# Altium PCB PCB1.PcbDoc (part 6 of 7)
Units mm, origin at the board's own origin, x right, y up, seen from the top; angles counter-clockwise.
Board outline 100 x 100 mm, 6 copper layers (Top, GND_1, Signal, PWR, GND_2, Bottom), stack 0.816 mm thick; 321 components, 260 nets, 1718 pads, 694 vias.
Unrouted connection lines stored in the file: 527.
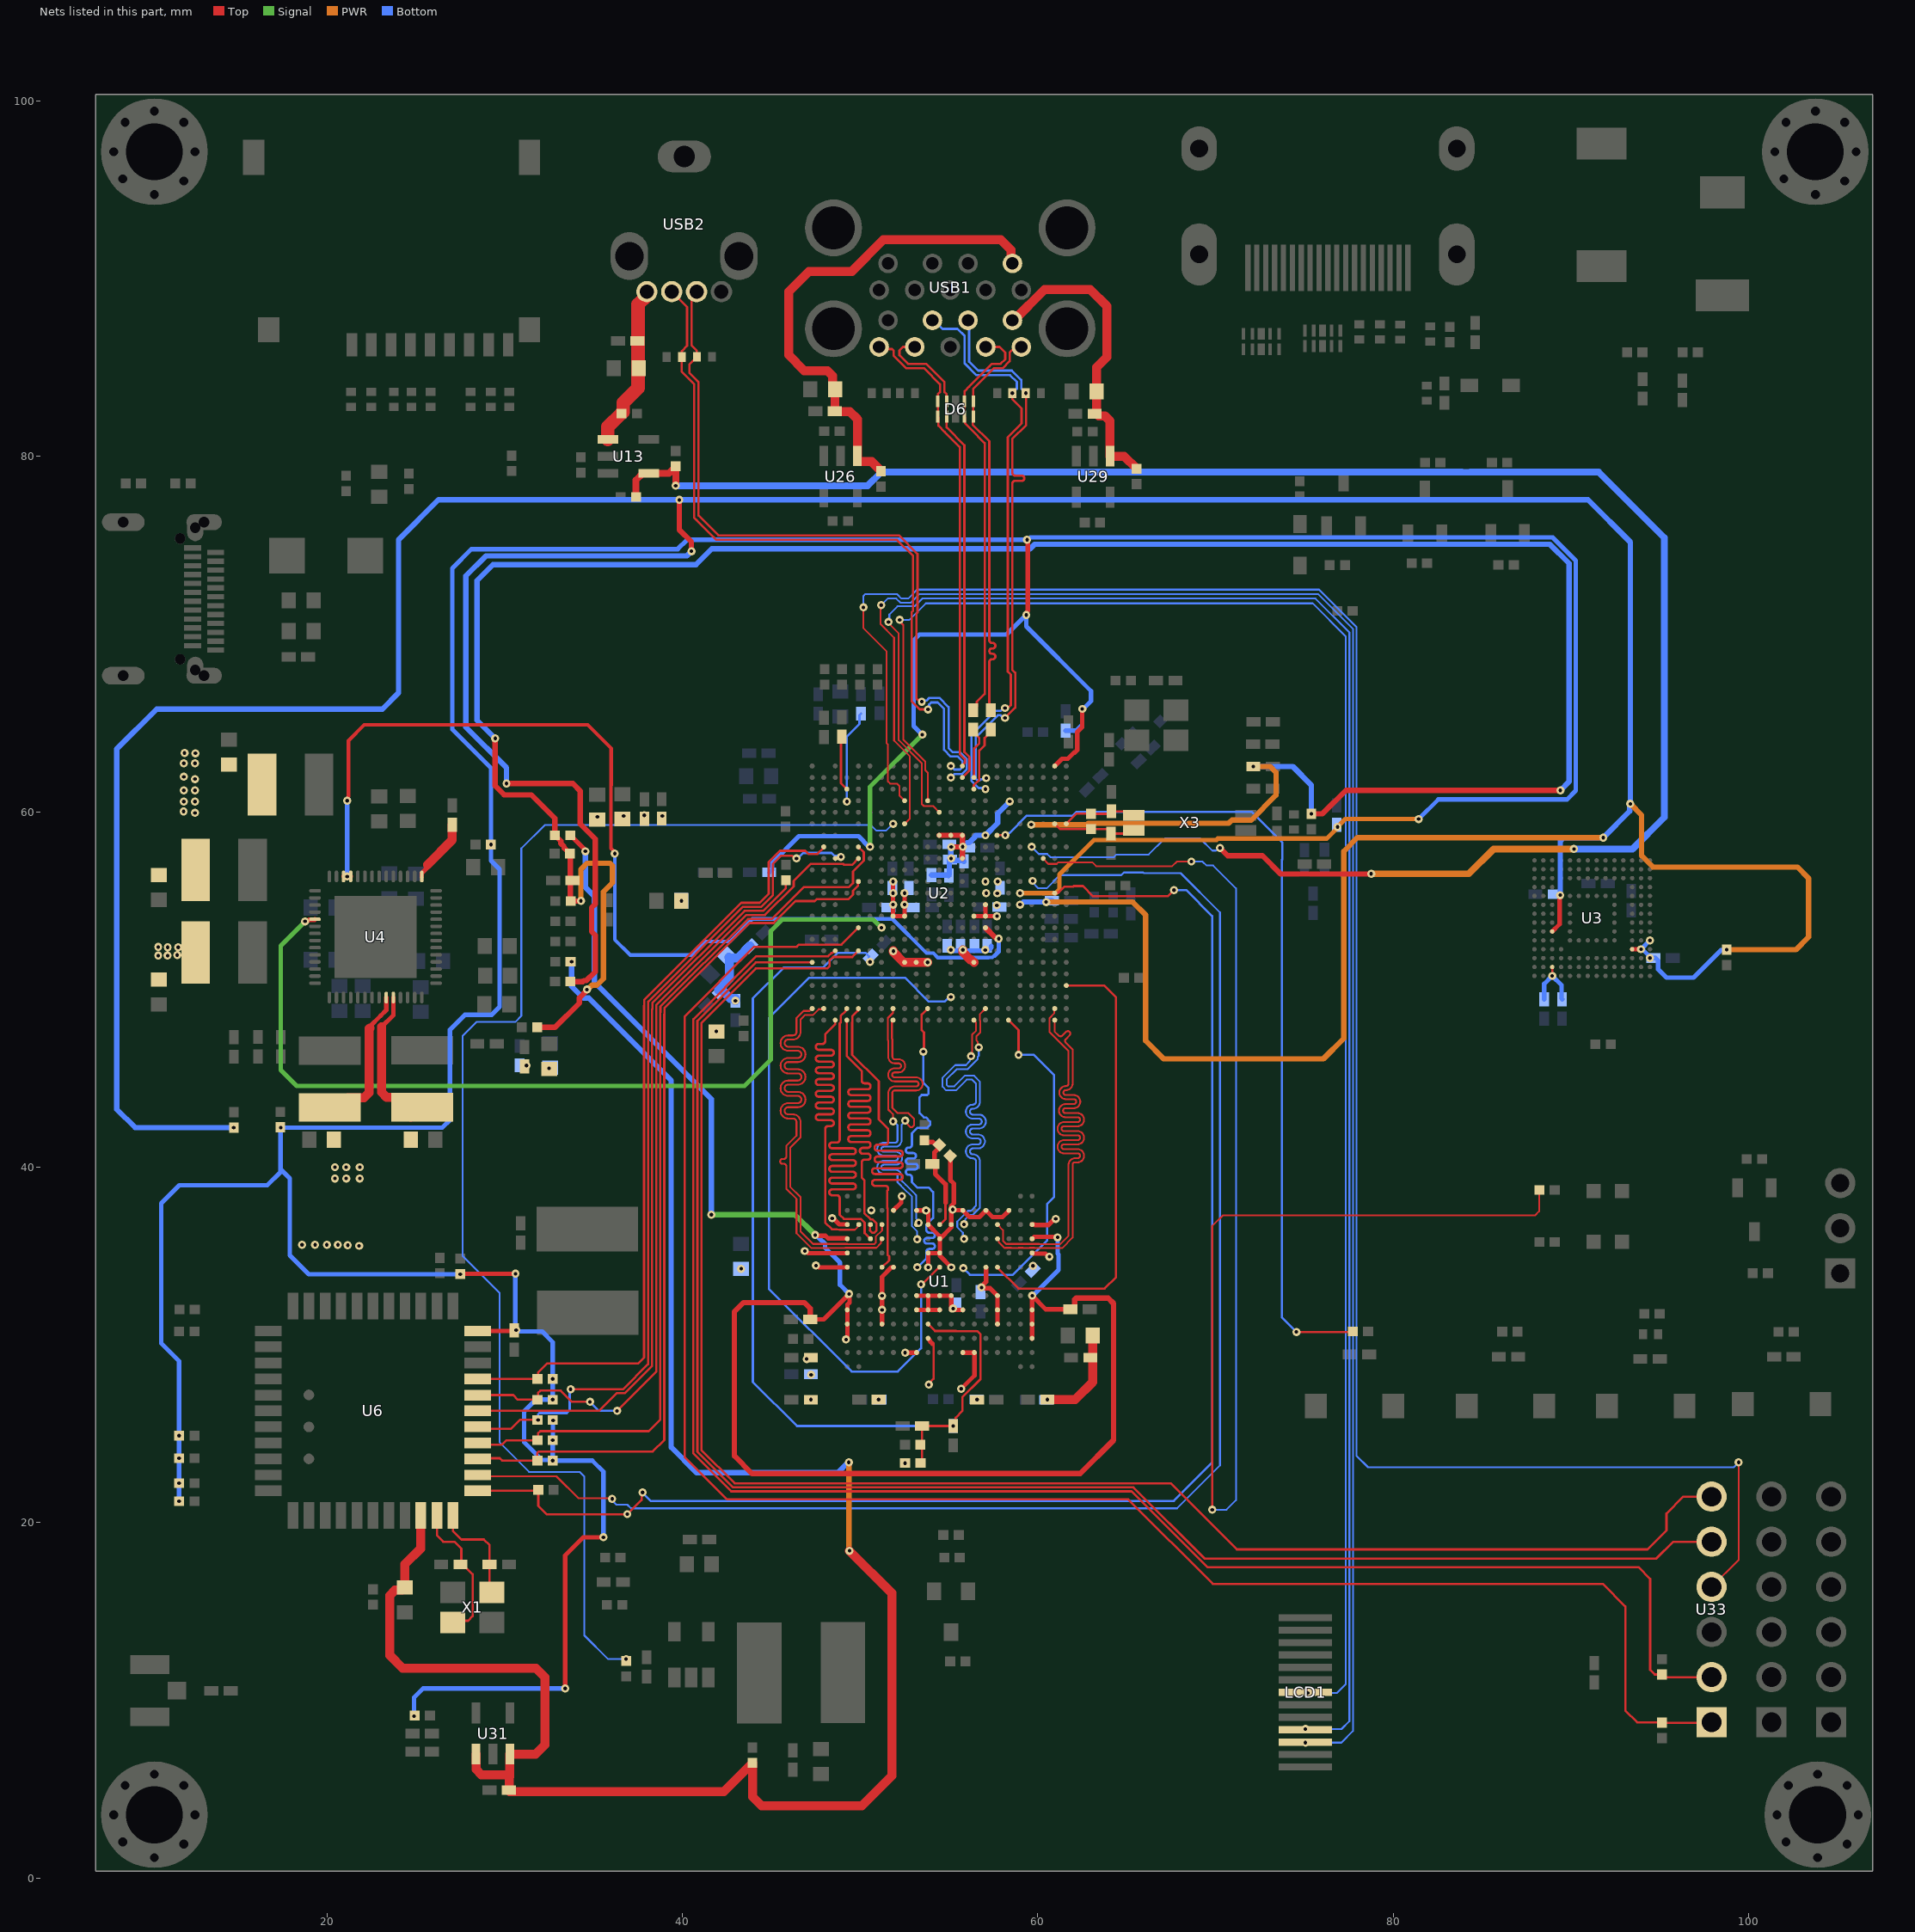
[diagram p9: the nets of this part, all layers, seen from the top]

## Via types
v1: diameter 0.457, hole 0.203, Top to Bottom, tented both sides, 685 vias
v2: diameter 0.61, hole 0.305, Top to Bottom, tented both sides, 9 vias

## Nets (pads, with @x,y where several pads share a name; then routed paths per layer and width w, separated by ;. In a path a pad name is that pad's centre, name@x,y a point inside that pad or via, vN(x,y) a via of type N, cw(c..) or ccw(c..) an arc to the next point about the centre after c; other vN are vias at no path point) (continued)
SDQ29: U1.B11 U2.AC3 | length 25.9
  Top w0.102: 48.698,36.515 48.71,36.503 48.804,36.503 48.822,36.485 49.703,36.485 49.854,36.636 49.854,36.639 49.934,36.718 U1.B11@49.934,36.767
  Top w0.127: U2.AC3@48.603,48.282 48.603,48.055 48.04,47.492 48.04,47.371 48.04,47.107 cw(c47.874,47.107) 47.874,46.942 47.674,46.942 ccw(c47.674,46.777) 47.674,46.612 48.356,46.612 cw(c48.356,46.447) 48.356,46.282 47.674,46.282 ccw(c47.674,46.117) 47.674,45.952 48.356,45.952 cw(c48.356,45.787) 48.356,45.621 47.674,45.621 ccw(c47.674,45.456) 47.674,45.291 48.356,45.291 cw(c48.356,45.126) 48.356,44.961 47.674,44.961 ccw(c47.674,44.796) 47.674,44.631 48.356,44.631 cw(c48.356,44.466) 48.356,44.301 47.674,44.301 ccw(c47.674,44.136) 47.674,43.97 48.356,43.97 cw(c48.356,43.805) 48.356,43.64 47.674,43.64 ccw(c47.674,43.475) 47.674,43.31 48.356,43.31 cw(c48.356,43.145) 48.356,42.98 47.674,42.98 ccw(c47.674,42.815) 47.674,42.65 48.356,42.65 cw(c48.356,42.485) 48.356,42.319 48.205,42.319 ccw(c48.205,42.154) 48.04,42.154 48.04,41.761 48.04,36.894 48.418,36.515 48.698,36.515
SDQ30: U1.C11 U2.AC4 | length 26.2
  Top w0.127: U2.AC4@49.253,48.276 49.253,46.251 50.091,45.413 50.091,44.952 50.091,44.889 ccw(c50.256,44.889) 50.256,44.723 50.424,44.723 cw(c50.424,44.558) 50.424,44.393 49.498,44.393 ccw(c49.498,44.228) 49.498,44.063 50.424,44.063 cw(c50.424,43.898) 50.424,43.733 49.498,43.733 ccw(c49.498,43.568) 49.498,43.403 50.424,43.403 cw(c50.424,43.238) 50.424,43.072 49.498,43.072 ccw(c49.498,42.907) 49.498,42.742 50.424,42.742 cw(c50.424,42.577) 50.424,42.412 49.498,42.412 ccw(c49.498,42.247) 49.498,42.082 50.424,42.082 cw(c50.424,41.917) 50.424,41.752 49.498,41.752 ccw(c49.498,41.587) 49.498,41.421 50.424,41.421 cw(c50.424,41.256) 50.424,41.091 50.15,41.091 ccw(c50.15,40.926) 50.15,40.761 50.424,40.761 cw(c50.424,40.596) 50.424,40.431 50.256,40.431 ccw(c50.256,40.266) 50.091,40.266 50.091,40.001 50.091,39.412 50.237,39.266 50.237,38.29 50.237,38.227 ; 50.236,38.226 50.236,37.694 50.237,37.692 50.237,37.418 50.584,37.071 50.686,37.071 50.927,36.83 50.927,36.449 50.8,36.322 50.673,36.322 50.546,36.449 50.55,36.453 50.55,36.747 U1.C11@50.58,36.776
SDQ31: U1.C10 U2.AB4 | length 26.1
  Top w0.127: U2.AB4@49.253,48.932 49.253,48.89 49.18,48.818 49.18,48.791 48.904,48.515 48.904,48.41 48.907,48.408 48.907,48.156 48.853,48.102 48.853,42.046 48.853,41.561 cw(c48.688,41.561) 48.688,41.396 48.432,41.396 ccw(c48.432,41.231) 48.432,41.065 49.592,41.065 cw(c49.592,40.9) 49.592,40.735 48.432,40.735 ccw(c48.432,40.57) 48.432,40.405 49.592,40.405 cw(c49.592,40.24) 49.592,40.075 48.432,40.075 ccw(c48.432,39.91) 48.432,39.745 49.592,39.745 cw(c49.592,39.58) 49.592,39.414 48.432,39.414 ccw(c48.432,39.249) 48.432,39.084 49.592,39.084 cw(c49.592,38.919) 49.592,38.754 48.432,38.754 ccw(c48.432,38.589) 48.432,38.424 48.688,38.424 cw(c48.688,38.259) 48.853,38.259 48.853,38.195 48.853,37.326 49.083,37.097 50.037,37.097 50.253,36.881 50.253,36.297 U1.C10@50.584,35.966
SDQM0: U1.L8 U2.AC18 | length 19.8
  Top w0.127: U2.AC18@58.353,48.282 58.918,47.717 v1(58.918,46.323)
  Bottom w0.127: v1(55.803,34.32) 56.174,33.949 58.591,33.949 60.52,35.879 60.52,37.931 60.906,38.316 60.906,45.199 59.782,46.323 v1(58.918,46.323)
SDQM1: U1.P8 U2.Y23 | length 26.3
  Top w0.127: U1.P8@57.734,34.366 57.734,34.343 58.905,33.172 63.76,33.172 64.401,33.813 64.401,49.559 63.728,50.232 U2.Y23@61.603,50.232
SDQM2: U1.G8 U2.AB11 | length 21.6
  Top w0.127: v1(53.558,46.51) 53.594,46.546 53.594,47.584 53.467,47.711 53.467,48.596 U2.AB11@53.803,48.932
  Bottom w0.127: v1(53.222,34.373) 53.734,34.885 53.734,35.253 cw(c53.886,35.253) 53.886,35.405 54.054,35.405 ccw(c54.054,35.558) 54.054,35.71 53.757,35.71 cw(c53.757,35.863) 53.757,36.015 54.054,36.015 ccw(c54.054,36.167) 54.054,36.32 53.886,36.32 cw(c53.886,36.472) 53.734,36.472 53.734,36.78 54.079,37.126 54.105,37.152 54.105,38.605 53.848,38.862 53.213,38.862 52.915,39.16 52.915,39.364 52.915,39.428 ccw(c52.762,39.428) 52.762,39.58 52.724,39.58 cw(c52.724,39.733) 52.724,39.885 53.091,39.885 ccw(c53.091,40.037) 53.091,40.19 52.724,40.19 cw(c52.724,40.342) 52.724,40.495 52.991,40.495 ccw(c52.991,40.647) 52.991,40.799 52.724,40.799 cw(c52.724,40.952) 52.724,41.104 52.762,41.104 ccw(c52.762,41.257) 52.915,41.257 52.915,41.694 52.915,41.915 53.226,42.226 53.783,42.226 53.94,42.383 53.94,42.58 53.721,42.799 53.594,42.799 53.345,43.048 53.345,43.302 53.34,43.307 53.34,43.942 53.467,44.069 53.774,44.069 53.848,44.143 53.848,44.45 53.558,44.74 v1(53.558,46.51)
SDQM3: U1.D8 U2.AB5 | length 26.3
  Top w0.127: U2.AB5@49.903,48.932 49.874,48.903 49.874,48.807 49.557,48.49 49.557,48.156 49.555,48.155 49.555,46.33 51.054,44.831 51.054,42.691 51.577,42.168 51.577,41.709 51.577,41.434 cw(c51.412,41.434) 51.412,41.269 50.981,41.269 ccw(c50.981,41.104) 50.981,40.939 52.236,40.939 cw(c52.236,40.773) 52.236,40.608 50.981,40.608 ccw(c50.981,40.443) 50.981,40.278 52.236,40.278 cw(c52.236,40.113) 52.236,39.948 50.838,39.948 ccw(c50.838,39.783) 50.838,39.618 52.236,39.618 cw(c52.236,39.453) 52.236,39.288 50.838,39.288 ccw(c50.838,39.122) 50.838,38.957 51.412,38.957 cw(c51.412,38.792) 51.577,38.792 51.577,38.729 51.52,38.672 51.52,37.714 51.542,37.693 51.542,35.078 51.633,34.986 51.633,34.765 U1.D8@51.234,34.366
SDQS0_N: U1.L11 U2.AB16 | length 19.7
  Top w0.102: v1(56.679,46.751) 56.611,46.819 56.611,47.07 56.536,47.145 56.536,47.356 56.762,47.582 56.762,48.231 56.735,48.259 56.735,48.614 U2.AB16@57.053,48.932
  Bottom w0.102: v1(55.847,36.79) 55.909,36.851 55.909,37.064 56.163,37.318 56.332,37.318 56.744,37.73 56.744,38.042 56.744,40.12 56.744,40.171 56.744,40.336 ccw(c56.35,40.336) 56.35,40.73 56.345,40.73 cw(c56.345,40.895) 56.345,41.06 56.629,41.06 ccw(c56.629,41.454) 56.629,41.848 56.345,41.848 cw(c56.345,42.013) 56.345,42.178 56.683,42.178 ccw(c56.683,42.571) 56.683,42.965 56.345,42.965 cw(c56.345,43.13) 56.345,43.295 56.35,43.295 ccw(c56.35,43.689) 56.744,43.689 56.744,44.577 56.744,44.815 56.61,44.949 56.531,45.027 56.397,45.161 55.906,45.161 55.303,44.558 54.942,44.558 54.871,44.629 54.871,44.945 55.446,45.52 56.045,45.52 56.619,46.094 56.619,46.208 56.679,46.267 v1(56.679,46.751)
SDQS0_P: U1.L10 U2.AC15 | length 19.9
  Top w0.102: v1(56.24,46.251) 56.299,46.311 56.299,47.454 56.525,47.68 56.525,48.133 56.403,48.256 U2.AC15@56.403,48.282
  Bottom w0.102: v1(55.851,35.967) 55.783,36.035 55.783,36.318 55.468,36.633 55.468,36.947 56.068,37.547 56.237,37.547 56.515,37.825 56.515,40.171 56.515,40.336 ccw(c56.35,40.336) 56.35,40.501 56.345,40.501 cw(c56.345,40.895) 56.345,41.289 56.629,41.289 ccw(c56.629,41.454) 56.629,41.619 56.345,41.619 cw(c56.345,42.013) 56.345,42.406 56.683,42.406 ccw(c56.683,42.571) 56.683,42.737 56.345,42.737 cw(c56.345,43.13) 56.345,43.524 56.35,43.524 ccw(c56.35,43.689) 56.515,43.689 56.515,44.5 ; v1(56.24,46.251) 56.179,46.19 56.179,45.977 55.95,45.749 55.351,45.749 54.642,45.04 54.642,44.534 54.847,44.33 55.398,44.33 56.001,44.933 56.303,44.933 56.515,44.72 56.515,44.5 ; 56.515,44.544 56.515,44.5
SDQS1_N: U1.P11 U2.AB22 | length 25.7
  Top w0.102: U1.P11@57.734,36.767 58.039,36.462 58.039,35.995 58.039,35.864 58.218,35.685 60.069,35.685 60.075,35.679 61.27,35.679 61.729,36.138 61.729,38.45 61.729,40.139 cw(c62.097,40.139) 62.097,40.508 62.237,40.508 ccw(c62.237,40.647) 62.237,40.787 61.477,40.787 cw(c61.477,41.155) 61.477,41.524 62.237,41.524 ccw(c62.237,41.663) 62.237,41.803 61.477,41.803 cw(c61.477,42.171) 61.477,42.54 62.237,42.54 ccw(c62.237,42.679) 62.237,42.819 61.559,42.819 cw(c61.559,43.187) 61.559,43.556 62.021,43.556 ccw(c62.021,43.695) 62.021,43.835 61.582,43.835 cw(c61.582,44.203) 61.582,44.572 61.589,44.572 ccw(c61.589,44.711) 61.729,44.711 61.729,45.549 61.729,46.537 60.662,47.604 60.662,48.402 60.919,48.659 60.919,48.898 U2.AB22@60.953,48.932
SDQS1_P: U1.P10 U2.AC22 | length 25.7
  Top w0.102: U1.P10@57.734,35.966 57.734,35.923 57.81,35.847 57.81,35.769 58.123,35.457 58.195,35.457 58.205,35.466 58.498,35.466 58.507,35.457 58.898,35.457 58.907,35.466 59.148,35.466 59.158,35.457 59.548,35.457 59.558,35.466 59.798,35.466 59.808,35.457 61.358,35.457 61.365,35.451 61.957,36.043 61.957,38.45 61.957,40.139 cw(c62.097,40.139) 62.097,40.279 62.237,40.279 ccw(c62.237,40.647) 62.237,41.016 61.477,41.016 cw(c61.477,41.155) 61.477,41.295 62.237,41.295 ccw(c62.237,41.663) 62.237,42.032 61.477,42.032 cw(c61.477,42.171) 61.477,42.311 62.237,42.311 ccw(c62.237,42.679) 62.237,43.048 61.559,43.048 cw(c61.559,43.187) 61.559,43.327 62.021,43.327 ccw(c62.021,43.695) 62.021,44.064 61.582,44.064 cw(c61.582,44.203) 61.582,44.343 61.589,44.343 ccw(c61.589,44.711) 61.957,44.711 61.957,45.549 61.957,46.632 61.81,46.78 61.774,46.816 61.576,47.013 cw(c61.675,47.112) 61.576,47.211 61.79,47.425 ccw(c61.691,47.524) 61.79,47.622 ccw(c61.691,47.524) 61.592,47.622 61.378,47.408 ; U2.AC22@60.954,48.281 60.944,48.27 60.944,48.158 60.944,47.645 61.181,47.408 ccw(c61.28,47.507) 61.378,47.408
SDQS2_N: U1.G11 U2.AC8 | length 21.5
  Top w0.102: U2.AC8@51.853,48.282 51.853,48.234 51.791,48.171 51.791,47.24 51.816,47.215 51.816,46.38 51.816,46.215 ccw(c51.956,46.215) 51.956,46.076 52.168,46.076 cw(c52.168,45.707) 52.168,45.339 51.944,45.339 ccw(c51.944,45.199) 51.944,45.06 53.151,45.06 cw(c53.151,44.691) 53.151,44.323 51.954,44.323 ccw(c51.954,44.183) 51.814,44.183 51.814,43.968 51.816,43.966 51.816,43.753 51.816,43.342 52.105,43.053 52.705,43.053 53.036,42.722 53.036,42.368 52.919,42.251 52.835,42.251 52.536,42.551 v1(52.536,42.623)
  Bottom w0.102: v1(52.536,42.623) 52.536,42.585 52.336,42.385 52.336,42.198 52.336,41.525 cw(c51.968,41.525) 51.968,41.157 51.328,41.157 ccw(c51.328,41.017) 51.328,40.877 51.989,40.877 cw(c51.989,40.509) 51.989,40.141 51.328,40.141 ccw(c51.328,40.001) 51.328,39.861 51.968,39.861 cw(c51.968,39.493) 52.336,39.493 52.336,39.249 52.521,39.064 52.562,39.024 52.994,38.591 ; 53.041,38.544 53.152,38.433 53.152,37.328 53.149,37.326 53.149,37.109 53.3,36.957 v1(53.3,36.871)
SDQS2_P: U1.G10 U2.AB8 | length 21.6
  Top w0.102: U2.AB8@51.853,48.932 51.853,48.693 51.562,48.402 51.562,47.145 51.587,47.12 51.587,46.38 51.587,46.215 ccw(c51.956,46.215) 51.956,45.847 52.168,45.847 cw(c52.168,45.707) 52.168,45.568 51.944,45.568 ccw(c51.944,45.199) 51.944,44.831 53.151,44.831 cw(c53.151,44.691) 53.151,44.552 51.954,44.552 ccw(c51.954,44.183) 51.586,44.183 51.586,43.968 51.584,43.966 51.584,43.753 51.587,43.75 51.587,43.247 51.843,42.992 51.843,42.591 v1(51.854,42.581)
  Bottom w0.102: v1(51.854,42.581) 51.903,42.581 52.107,42.376 52.107,42.198 52.107,41.525 cw(c51.968,41.525) 51.968,41.385 51.328,41.385 ccw(c51.328,41.017) 51.328,40.649 51.989,40.649 cw(c51.989,40.509) 51.989,40.369 51.328,40.369 ccw(c51.328,40.001) 51.328,39.633 51.968,39.633 cw(c51.968,39.493) 52.107,39.493 52.107,39.155 52.238,39.024 52.426,38.836 52.923,38.339 52.923,37.423 52.921,37.421 52.921,36.685 53.213,36.392 v1(53.213,35.941)
SDQS3_N: U1.D11 U2.AB2 | length 26.3
  Top w0.102: U2.AB2@47.953,48.932 47.919,48.898 47.68,48.898 47.355,48.573 46.911,48.573 46.762,48.423 46.649,48.311 46.649,47.623 cw(c46.218,47.623) 46.218,47.191 45.955,47.191 ccw(c45.955,46.988) 45.752,46.988 ccw(c45.955,46.988) 45.955,46.785 46.494,46.785 cw(c46.494,46.353) 46.926,46.353 cw(c46.494,46.353) 46.494,45.921 45.955,45.921 ccw(c45.955,45.718) 45.752,45.718 ccw(c45.955,45.718) 45.955,45.515 46.494,45.515 cw(c46.494,45.083) 46.926,45.083 cw(c46.494,45.083) 46.494,44.651 45.955,44.651 ccw(c45.955,44.448) 45.752,44.448 ccw(c45.955,44.448) 45.955,44.245 46.494,44.245 cw(c46.494,43.813) 46.926,43.813 cw(c46.494,43.813) 46.494,43.381 45.955,43.381 ccw(c45.955,43.178) 45.752,43.178 ccw(c45.955,43.178) 45.955,42.975 46.218,42.975 cw(c46.218,42.543) 46.649,42.543 46.649,42.051 46.649,41.688 46.076,41.114 46.076,38.887 46.649,38.314 46.649,36.385 47.359,35.676 47.368,35.685 49.276,35.685 49.285,35.676 50.796,35.676 50.878,35.757 50.878,36.087 51.234,36.444 U1.D11@51.234,36.767
SDQS3_P: U1.D10 U2.AB1 | length 26.3
  Top w0.102: U2.AB1@47.303,48.932 47.285,48.932 47.154,48.801 46.817,48.801 46.438,48.423 46.421,48.406 46.421,47.623 cw(c46.218,47.623) 46.218,47.42 45.955,47.42 ccw(c45.955,46.988) 45.523,46.988 ccw(c45.955,46.988) 45.955,46.556 46.494,46.556 cw(c46.494,46.353) 46.698,46.353 cw(c46.494,46.353) 46.494,46.15 45.955,46.15 ccw(c45.955,45.718) 45.523,45.718 ccw(c45.955,45.718) 45.955,45.286 46.494,45.286 cw(c46.494,45.083) 46.698,45.083 cw(c46.494,45.083) 46.494,44.88 45.955,44.88 ccw(c45.955,44.448) 45.523,44.448 ccw(c45.955,44.448) 45.955,44.016 46.494,44.016 cw(c46.494,43.813) 46.698,43.813 cw(c46.494,43.813) 46.494,43.61 45.955,43.61 ccw(c45.955,43.178) 45.523,43.178 ccw(c45.955,43.178) 45.955,42.746 46.218,42.746 cw(c46.218,42.543) 46.421,42.543 46.421,42.051 46.421,41.783 45.847,41.209 45.847,40.97 45.847,40.611 cw(c45.707,40.611) 45.707,40.471 45.64,40.471 ccw(c45.64,40.331) 45.64,40.191 45.707,40.191 cw(c45.707,40.052) 45.847,40.052 45.847,40.001 45.847,38.793 46.421,38.219 46.421,36.291 47.264,35.447 49.14,35.447 49.159,35.466 50.872,35.466 ; 50.872,35.447 50.891,35.447 51.172,35.729 51.172,35.856 51.24,35.924 U1.D10@51.24,35.96
SODT0: U1.J8 U2.AA13 | length 43.2
  Top w0.127: v1(53.431,33.409) 53.471,33.409 54.428,34.366 U1.J8@54.483,34.366
  Bottom w0.127: v1(53.431,33.409) 53.431,29.809 52.126,28.504 49.525,28.504 44.868,33.162 44.868,48.406 47.127,50.665 52.519,50.665 53.858,49.327 54.766,49.327 55.021,49.582 v1(55.103,49.582)
SPI1_CLK: LCD1.4 U2.E12 | length 103.6
  Top w0.102: v1(51.599,70.685) 51.599,70.626 52.175,70.049 52.175,64.04 53.467,62.748 53.467,60.452 53.594,60.325 54.11,60.325 U2.E12@54.453,59.982
  Bottom w0.102: v1(51.599,70.685) 51.644,70.731 51.644,71.112 52.102,71.57 53.059,71.57 53.498,72.009 75.63,72.009 77.534,70.106 77.534,8.827 77.089,8.382 v1(75.057,8.382)
SPI1_CS: LCD1.7 U2.D11 | length 98.4
  Top w0.102: v1(52.231,70.811) 52.231,70.714 52.43,70.515 52.43,64.069 53.669,62.831 53.669,62.349 53.803,62.215 U2.D11@53.803,60.632
  Bottom w0.102: v1(52.231,70.811) 52.777,70.811 53.703,71.737 75.474,71.737 77.332,69.88 77.332,10.911 76.835,10.414 v1(75.184,10.414)
SPI1_MISO: U2.D9 U33.4 | length 117.9
  Top w0.102: v1(50.187,71.509) 50.187,70.336 51.481,69.042 51.481,68.377 ; 51.481,66.819 51.481,63.879 51.562,63.797 51.562,61.722 51.689,61.595 52.07,61.595 52.212,61.453 52.212,60.923 U2.D9@52.503,60.632 ; 51.482,66.82 51.482,68.376 ; U33.4@97.916,16.383 99.442,17.909 v1(99.442,23.398)
  Bottom w0.102: v1(50.187,71.509) 50.187,72.158 50.292,72.263 52.07,72.263 52.324,72.009 52.705,72.009 53.208,72.512 75.832,72.512 77.937,70.408 77.937,23.763 78.586,23.114 99.158,23.114 v1(99.442,23.398)
SPI1_MOSI: LCD1.3 U2.F9 | length 105.9
  Top w0.102: v1(51.184,71.636) 51.157,71.609 51.157,70.56 51.914,69.804 51.914,64.016 52.8,63.129 52.8,59.629 U2.F9@52.503,59.332
  Bottom w0.102: v1(51.184,71.636) 51.557,72.009 52.039,72.009 52.277,71.771 52.848,71.771 53.34,72.263 75.774,72.263 77.735,70.302 77.735,8.266 77.089,7.62 v1(75.057,7.62)
STATUS_LED: R91.1 U2.J21 | length 83.8
  Top w0.102: U2.J21@60.303,57.382 60.303,57.358 60.588,57.073 61.056,57.073 61.146,57.164 63.062,57.164 63.281,56.945 67.562,56.945 67.825,57.208 v1(68.644,57.208) ; v1(69.816,20.726) 69.816,36.698 70.407,37.289 87.973,37.289 88.208,37.524 88.208,38.706 R91.1@88.227,38.725
  Bottom w0.102: v1(68.644,57.208) 69.268,57.208 69.495,56.98 69.865,56.98 71.15,55.695 71.15,21.26 70.616,20.726 v1(69.816,20.726)
SVREF: C13.2 C17.2 C21.2 C31.2 R3.1 R6.2 U1.H4 U2.V6 | length 54.7
  Top w0.127: R3.1@53.396,23.349 53.488,23.441 C31.2@53.488,25.434 53.491,25.437 v1(55.245,25.437) 55.372,25.564 55.372,25.908 55.753,26.289 55.753,27.048 56.769,28.064 56.769,30.607 56.596,30.78 55.408,30.78 55.4,30.787 54.211,30.787 U1.H4@53.833,31.166
  Bottom w0.127: C21.2@50.48,51.846 50.48,51.639 v1(50.558,51.561) ; C21.2@50.498,51.864 50.292,52.07 48.748,52.07 47.917,51.239 45.704,51.239 43.967,49.502 43.967,27.915 46.445,25.437 v1(55.245,25.437)
SVREF_DQ: C32.2 R4.1 R7.2 U1.J11 | length 6
  Top w0.127: U1.J11@54.483,36.767 54.801,37.085 54.801,37.999
  Top w0.254: R7.2@53.614,41.519 53.717,41.416 54.094,41.416 54.254,41.255 R4.1@54.456,41.255 54.456,41.109 54.19,40.843 54.19,40.305 C32.2@54.069,40.183 ; C32.2@54.086,40.183 54.229,40.04 54.229,39.624 54.81,39.043 54.81,38.007
TWIO_SCL: R82.1 U2.U3 U33.2 | length 99.5
  Top w0.127: U2.U3@48.603,52.182 48.562,52.182 48.442,52.063 48.383,52.063 48.199,51.879 44.16,51.879 40.613,48.331 40.613,23.896 42.75,21.759 65.283,21.759 69.549,17.492 93.795,17.492 94.458,16.829 94.458,11.714 94.721,11.451 R82.1@95.123,11.451 95.271,11.303 U33.2@97.916,11.303
TWIO_SDA: R83.1 U2.R5 U33.1 | length 104.1
  Top w0.127: U2.R5@49.903,53.482 48.95,52.528 46.558,52.528 46.437,52.407 44.047,52.407 40.123,48.484 40.123,23.693 42.512,21.305 65.094,21.305 69.851,16.549 91.799,16.549 93.066,15.282 93.066,9.423 93.726,8.763 95.1,8.763 R83.1@95.123,8.74 U33.1@97.409,8.74 ; U33.1@97.409,8.636 97.789,8.636 U33.1@97.916,8.763
UART3_RX: U2.V1 U33.5 | length 92
  Top w0.127: U2.V1@47.303,51.532 44.135,51.532 40.84,48.237 40.84,23.99 42.844,21.986 65.377,21.986 69.388,17.974 94.809,17.974 95.758,18.923 U33.5@97.916,18.923
UART3_TX: U2.U5 U33.6 | length 95.7
  Top w0.127: U2.U5@49.903,52.182 49.557,51.836 48.477,51.836 48.278,51.636 48.278,51.311 48.153,51.186 44.135,51.186 41.067,48.118 41.067,24.084 42.938,22.213 67.486,22.213 71.203,18.496 94.315,18.496 95.377,19.558 95.377,20.506 96.334,21.463 U33.6@97.916,21.463
UBOOT: R87.2 U2.G17 | length 48.4
  Top w0.127: U2.G17@57.703,58.682 57.71,58.689 58.165,58.689 v1(58.172,58.696) ; v1(74.549,30.734) 77.701,30.734 R87.2@77.723,30.756
  Bottom w0.127: v1(58.172,58.696) 58.261,58.696 58.374,58.809 58.397,58.809 59.374,59.786 61.954,59.786 62.178,60.01 72.036,60.01 73.755,58.29 73.755,57.312 73.744,57.301 73.744,31.539 v1(74.549,30.734)
USB0_DRVVBUS: R54.1 R57.2 U2.H20 U13.4 | length 116.3
  Top w0.102: 70.646,57.575 70.686,57.535
  Top w0.305: v1(70.252,57.97) 70.646,57.575 ; 70.686,57.535 72.64,57.535 73.67,56.505 78.693,56.505 v1@78.714,56.526
  Top w0.381: R57.2@37.39,77.724 37.39,78.682 37.768,79.06 U13.4@38.111,79.06 39.247,79.06 R54.1@39.624,79.437 ; v1(39.624,78.359) R54.1@39.624,79.437 ; R54.1@39.624,79.45 R54.1@39.624,79.437
  PWR w0.381: v1(78.763,56.515) 84.254,56.515 85.651,57.912 v1(90.17,57.912)
  Bottom w0.102: v1(59.653,58.032) 60.053,57.632 60.532,57.632 60.713,57.451 64.28,57.451 64.426,57.597 66.241,57.597 67.157,58.514 69.129,58.514 69.82,57.823 70.009,57.823 70.155,57.97 v1(70.252,57.97)
  Bottom w0.381: v1(39.624,78.359) 50.419,78.359 51.181,79.121 83.87,79.121 83.877,79.114 84.328,79.114 84.334,79.121 91.567,79.121 95.25,75.438 95.25,59.69 93.472,57.912 v1(90.17,57.912)
USB0_N: U2.A13 U15.2 USB2.2 | length 42.1
  Top w0.127: USB2.2@39.399,89.282 40.264,88.418 40.264,86.233 39.967,85.937 U15.2@39.967,85.598 39.967,84.769 40.657,84.079 40.657,76.571 40.806,76.422 41.768,75.46 41.917,75.311 52.078,75.311 52.977,74.412 52.977,71.323 52.91,71.256 52.91,66.213 53.354,65.769 v1(53.821,65.769)
  Bottom w0.127: v1(53.821,65.769) 53.884,65.832 53.884,66.044 54.001,66.161 54.359,66.161 54.724,65.796 54.724,63.487 55.093,63.119 55.499,63.119 55.753,62.865 55.753,62.511 55.626,62.384 55.301,62.384 v1(55.103,62.582)
USB0_P: U2.B13 U14.2 USB2.3 | length 42.1
  Top w0.127: USB2.3@40.796,89.282 40.518,89.003 40.518,86.249 40.815,85.952 U14.2@40.815,85.613 40.386,85.185 40.386,84.709 40.836,84.259 40.911,84.184 40.911,76.676 42.022,75.565 52.183,75.565 53.231,74.517 53.231,71.218 53.164,71.151 53.164,66.382 53.238,66.308 53.281,66.308 53.384,66.204 v1(53.473,66.204)
  Bottom w0.127: v1(53.473,66.204) 53.537,66.267 53.748,66.267 53.896,66.415 54.464,66.415 54.978,65.901 54.978,63.593 55.198,63.373 55.604,63.373 55.679,63.299 56.007,62.97 56.007,62.406 55.731,62.13 55.301,62.13 v1(55.103,61.932)
USB1_AP_SSTX_N: C44.2 U2.B15 | length 3
  Top w0.127: C44.2@56.362,64.632 56.362,64.507 56.71,64.159 56.71,63.867 56.413,63.569 56.413,61.942 U2.B15@56.403,61.932
USB1_AP_SSTX_P: C45.2 U2.C15 | length 3.7
  Top w0.127: U2.C15@56.403,61.282 56.403,61.503 56.706,61.806 56.706,61.829 ; 56.707,61.83 56.707,63.447 57.005,63.745 57.005,64.159 57.353,64.507 C45.2@57.353,64.632
USB1_N: U2.B16 U27.2 USB1.11 | length 31.8
  Top w0.127: v1(58.151,65.288) 58.152,65.288 58.733,65.869 58.733,67.827 58.564,67.995 58.564,78.105 58.564,78.473 cw(c58.717,78.473) 58.717,78.626 59.088,78.626 ccw(c59.088,78.778) 59.088,78.931 58.717,78.931 cw(c58.717,79.083) 58.564,79.083 58.564,79.883 58.564,80.984 59.342,81.762 59.342,83.545 v1(59.321,83.566)
  Bottom w0.127: USB1.11@56.073,87.669 56.137,87.606 56.137,85.341 56.642,84.836 58.541,84.836 59.071,84.306 59.071,83.816 v1(59.321,83.566) ; v1(57.099,61.901) 57.036,61.838 56.801,61.838 56.722,61.759 56.617,61.759 56.515,61.861 56.515,64.206 57.748,65.439 57.911,65.439 58.063,65.288 v1(58.151,65.288)
USB1_P: U2.C16 U28.2 USB1.12 | length 32.5
  Top w0.127: v1(58.155,65.845) 58.218,65.908 58.379,65.908 58.479,66.008 58.479,67.721 58.31,67.89 58.31,78.105 58.31,81.089 59.088,81.867 59.088,82.706 58.567,83.227 v1(58.567,83.566)
  Bottom w0.127: USB1.12@54.073,87.669 54.148,87.669 54.634,87.183 55.483,87.183 55.88,86.786 55.88,85.239 56.537,84.582 58.436,84.582 58.817,84.201 58.817,83.816 v1(58.567,83.566) ; v1(57.053,61.282) 56.99,61.345 56.672,61.345 56.261,61.756 56.261,64.312 57.643,65.693 57.915,65.693 58.067,65.845 v1(58.155,65.845)
USB1_SSRX_N: D6.1 D6.10 U2.A14 USB1.14 | length 26.7
  Top w0.127: USB1.14@51.073,86.169 51.197,86.046 51.805,86.046 51.88,85.971 51.88,85.678 52.595,84.963 53.606,84.963 54.495,84.074 54.495,83.629 54.372,83.506 D6.10@54.372,83.11 D6.1@54.372,82.244 54.409,82.208 54.409,81.737 54.767,81.379 55.612,80.534 55.612,63.267 55.903,62.976 55.903,62.773 55.753,62.623 U2.A14@55.753,62.582
USB1_SSRX_P: D6.2 D6.9 U2.B14 USB1.15 | length 27.4
  Top w0.127: USB1.15@53.073,86.169 52.407,86.168 52.212,85.973 52.212,85.705 52.7,85.217 53.711,85.217 54.749,84.179 54.749,83.629 54.872,83.506 D6.9@54.872,83.11 D6.2@54.872,82.244 54.872,81.633 55.866,80.639 55.866,63.372 56.157,63.081 56.157,62.336 U2.B14@55.753,61.932
USB1_SSTX_N: C44.1 D6.4 D6.7 USB1.17 | length 23.3
  Top w0.127: C44.1@56.362,65.722 56.569,65.929 56.569,66.196 57.016,66.644 57.016,80.76 56.23,81.546 55.909,81.867 55.909,82.208 D6.4@55.872,82.244 D6.7@55.872,83.11 55.883,83.121 55.883,83.682 56.14,83.939 57.269,85.068 57.418,85.217 57.912,85.217 58.166,85.471 58.166,85.852 57.849,86.169 USB1.17@57.073,86.169
USB1_SSTX_P: C45.1 D6.5 D6.6 USB1.18 | length 23.3
  Top w0.127: C45.1@57.353,65.722 57.27,65.806 57.27,68.072 57.27,68.44 cw(c57.422,68.44) 57.422,68.593 57.463,68.593 ccw(c57.463,68.745) 57.463,68.898 57.422,68.898 cw(c57.422,69.05) 57.422,69.202 57.463,69.202 ccw(c57.463,69.355) 57.463,69.507 57.422,69.507 cw(c57.422,69.66) 57.27,69.66 57.27,70.485 57.27,80.865 56.337,81.798 56.337,82.209 D6.5@56.372,82.244 D6.6@56.372,83.11 56.372,83.812 57.523,84.963 58.017,84.963 58.42,85.366 58.42,85.852 58.737,86.169 USB1.18@59.073,86.169
USB_VBUS0: C81.1 C82.1 R58.1 U13.1 USB2.1 | length 9.2
  Top w0.381: R58.1@36.563,82.423 R58.1@36.576,82.423 36.589,82.423 R58.1@36.668,82.503 ; USB2.1@38,89.06 USB2.1@38,89.282
  Top w0.762: U13.1@35.803,80.96 35.803,81.663 R58.1@36.563,82.423 ; R58.1@36.668,82.503 36.668,83.023 37.502,83.857 37.502,84.963 37.502,86.487 37.502,88.563 USB2.1@38,89.06
USB_VBUS1: C86.2 C87.2 R64.1 U29.1 USB1.10 | length 17.3
  Top w0.508: USB1.10@58.573,87.669 58.652,87.669 60.39,89.408 62.94,89.408 63.881,88.467 63.881,85.598 63.311,85.028 C87.2@63.311,83.671 63.311,82.42 63.295,82.404 C86.2@63.2,82.404 ; C86.2@63.433,82.296 63.771,82.296 64.069,81.998 U29.1@64.069,80.021 64.861,80.021 65.555,79.326 R64.1@65.555,79.314
USB_VBUS3: C84.2 C85.2 R61.1 U26.1 USB1.1 | length 28.7
  Top w0.508: R61.1@51.181,79.173 51.181,79.186 51.165,79.202 51.152,79.202 50.642,79.711 49.858,79.711 49.849,79.72 U26.1@49.849,80.036 49.849,82.104 49.418,82.535 48.589,82.535 C84.2@48.573,82.551 48.585,82.563 48.585,83.771 C85.2@48.598,83.784 48.452,83.93 48.452,84.538 48.154,84.836 46.863,84.836 45.974,85.725 45.974,89.281 47.117,90.424 49.53,90.424 51.308,92.202 57.906,92.202 58.486,91.622 58.486,90.956 USB1.1@58.573,90.869
VCC18_RTC: C59.2 C149.2 R39.1 R42.1 R43.1 R46.1 R75.1 U2.F20 | length 149.9
  Top w0.305: v1(29.464,64.135) 29.464,61.468 29.972,60.96 31.496,60.96 32.824,59.632 R39.1@32.824,58.676 32.837,58.676 33.154,58.359 33.154,58.224 33.346,58.033 33.346,57.976 33.663,57.658 R42.1@33.676,57.658 33.697,57.637 33.697,55.003 R46.1@33.717,54.982 34.281,54.982 v1(34.29,54.991) ; R43.1@31.825,47.879 32.836,47.879 34.2,49.243 34.2,49.533 34.627,49.96 v1(34.627,50.001) ; v1(75.395,59.891) 76.02,59.891 77.343,61.214 v1(89.408,61.214)
  PWR w0.305: v1(34.29,54.991) 34.29,56.769 34.636,57.115 35.925,57.115 36.068,56.971 36.068,56.007 35.56,55.499 35.56,50.61 35.196,50.246 34.913,50.246 34.668,50.001 v1(34.627,50.001) ; v1(59.632,59.28) 62.772,59.28 62.85,59.359 70.745,59.359 70.925,59.538 72.009,59.538 73.406,60.935 73.406,62.23 73.082,62.554 v1(72.131,62.554)
  Bottom w0.305: v1(29.464,64.135) 28.448,65.151 28.448,73.025 29.337,73.914 40.767,73.914 41.656,74.803 59.568,74.803 59.83,75.065 88.818,75.065 89.9,73.983 89.9,61.706 v1(89.408,61.214) ; v1(72.131,62.554) 74.352,62.554 75.395,61.511 v1(75.395,59.891)
VCC33_WIFI: C38.2 C96.2 R51.1 R68.2 U6.9 U31.1 U31.3 | length 113.3
  Top w0.305: U6.9@25.273,20.392 U6.9@25.28,20.399 ; C96.2@30.24,4.938 C96.2@30.263,4.961 ; U31.3@30.273,6.96 U31.3@30.287,6.974 ; R51.1@33.707,51.575 33.71,51.572 v1(33.768,51.572)
  Top w0.508: U6.9@25.273,20.392 25.273,18.542 24.381,17.65 C38.2@24.381,16.342 24.235,16.196 23.824,16.196 23.527,15.899 23.527,12.541 24.257,11.811 31.75,11.811 32.258,11.303 32.258,7.493 31.739,6.974 U31.3@30.287,6.974 ; U31.1@28.387,6.974 28.387,6.111 28.685,5.813 30.273,5.813 ; C96.2@30.263,4.961 30.263,5.715 ; C96.2@30.273,4.869 42.334,4.869 R68.2@43.942,6.477 43.942,4.572 44.45,4.064 50.101,4.064 51.791,5.754 51.791,16.027 v1(49.403,18.415) ; 30.273,5.715 U31.3@30.273,6.96
  PWR w0.305: v1(49.366,23.394) 49.366,18.452 v1(49.403,18.415)
  Bottom w0.305: v1(33.768,51.572) 33.768,50.18 34.428,49.52 34.728,49.52 39.37,44.878 39.37,24.244 40.795,22.82 48.755,22.82 49.329,23.394 v1(49.366,23.394)
VCC_DCXOIO: C40.2 C98.2 C100.2 C126.2 R18.2 R19.2 R20.2 R21.2 R24.1 R25.1 R26.1 R27.1 R28.1 R30.1 R47.1 R50.1 R69.2 U2.A22 U2.H6 U2.M19 U6.22 | length 290.8
  Top w0.254: v1(27.501,33.983) R30.1@27.5,33.998 27.506,34.004 30.602,34.004 v1(30.607,34.009) ; U6.22@28.527,30.734 U6.22@28.477,30.784 30.427,30.784 C40.2@30.47,30.742 ; C40.2@30.536,30.818 30.558,30.84 v1(30.644,30.84) ; v1(33.401,10.668) 33.401,18.161 34.417,19.177 v1(35.56,19.177) ; v1(59.353,71.087) 59.392,71.126 59.392,71.27 59.436,71.315 59.436,75.275 v1(59.398,75.313) ; U2.A22@60.953,62.582 61.363,62.992 61.69,62.992 62.035,63.338 62.081,63.338 62.214,63.47 62.214,64.485 62.503,64.774 v1(62.503,65.797)
  Signal w0.254: v1(50.553,58.032) 50.553,61.402 v1(53.502,64.351)
  PWR w0.254: v1(59.003,55.432) 61.02,55.432 61.214,55.626 61.214,56.473 63.161,58.42 70.058,58.42 70.136,58.498 76.257,58.498 76.864,59.106 v1(76.864,59.159) 77.303,59.598 v1(81.433,59.598)
  Bottom w0.254: v1(11.674,21.207) v1(11.674,22.223) v1(11.674,23.62) v1(11.674,24.89) 11.674,29.093 10.668,30.099 10.668,37.973 11.684,38.989 16.637,38.989 17.391,39.743 17.391,39.886 ; v1(24.892,9.111) 24.892,10.16 25.4,10.668 v1(33.401,10.668) ; v1@27.523,33.982 18.977,33.982 17.907,35.052 17.907,39.37 17.391,39.886 ; v1(30.607,34.009) 30.592,33.995 30.592,30.779 30.578,30.764 32.101,30.764 32.704,30.161 v1(32.704,28.091) v1(32.704,26.922) 31.748,26.922 31.093,26.267 31.093,24.533 32.094,23.532 32.666,23.532 v1(32.704,23.493) ; v1(32.726,25.751) 32.715,25.74 32.715,24.647 v1(32.704,24.636) v1(32.704,23.493) ; v1(35.56,19.177) 35.56,22.86 34.927,23.493 v1(32.704,23.493) ; C98.2@44.885,56.594 44.906,56.594 45.049,56.737 45.049,57.125 46.552,58.628 49.908,58.628 50.504,58.032 v1(50.553,58.032) ; v1(53.502,64.351) 53.018,64.835 53.018,69.655 53.34,69.977 58.242,69.977 v1(59.353,71.087) 59.353,70.441 62.992,66.802 62.992,66.23 62.558,65.797 v1(62.503,65.797) 62.503,64.916 62.16,64.573 C126.2@61.565,64.573 ; v1(81.433,59.598) 82.541,60.706 89.789,60.706 90.28,61.197 90.28,74.141 88.975,75.445 59.585,75.445 59.453,75.313 40.261,75.313 39.737,74.789 28.125,74.789 27.049,73.712 27.049,64.645 29.224,62.47 v1(29.224,58.162) 29.224,57.263 29.718,56.769 29.718,49.034 29.26,48.576 27.748,48.576 26.924,47.752 26.924,42.672 26.483,42.231 v1(17.391,42.231) 17.391,39.886
VCC_DRAM: C1.2 C2.2 C3.2 C4.2 C5.2 C6.2 C7.2 C8.2 C9.2 C10.2 C11.2 C12.2 C14.2 C15.2 C16.2 C22.2 C23.2 C24.2 C25.2 C26.2 C27.2 C28.2 C29.2 C30.2 C76.2 L6.2 R3.2 R4.2 U1.A8 U1.A9 U1.A11 U1.C12 U1.D4 U1.D5 U1.D6 U1.E8 U1.E12 U1.F2 U1.G2 U1.G5 U1.G6 U1.G12 U1.H3 U1.H5 U1.H6 U1.H8 U1.H9 U1.H11 U1.H12 U1.J5 U1.J6 U1.J9 U1.J10 U1.K5 U1.K6 U1.K8 U1.K11 U1.K12 U1.L2 U1.L5 U1.L12 U1.M2 U1.N8 U1.N12 U1.P4 U1.P5 U1.P6 U1.R12 U1.U8 U1.U9 U1.U11 U2.U8 U2.U13 U2.U14 U2.U16 U2.V9 U2.V10 U2.V11 U2.V15 U4.10 | length 68.2
  Top w0.127: v1@53.861,27.813 54.136,28.088 54.136,30.005 54.067,30.074
  Top w0.254: 23.067,47.893 23.733,48.559 U4.10@23.733,49.551 ; v1(46.889,35.286) 46.944,35.286 47.064,35.166 U1.A9@49.284,35.166 ; v1(47.518,34.47) 47.573,34.47 47.677,34.366 U1.A8@49.284,34.366 ; v1(48.432,37.13) 48.487,37.13 48.832,36.785 49.258,36.785 49.277,36.767 U1.A11@49.284,36.767 ; U1.C12@50.584,37.567 50.598,37.58 v1(50.629,37.58) ; U1.D4@51.234,31.166 51.234,31.966 U1.D5@51.234,31.977 ; v1(51.237,31.977) U1.D5@51.234,31.977 ; U1.E8@51.882,34.366 51.877,34.361 51.756,34.361 51.234,33.839 v1(51.234,32.766) U1.D5@51.234,31.977 ; U1.E12@51.882,37.567 51.882,37.58 52.312,38.011 52.312,38.336 v1(52.351,38.374) ; v1(52.532,29.566) U1.G2@53.183,29.566 ; U1.G5@53.183,31.966 U1.H5@53.833,31.966 ; U1.G6@53.183,32.766 U1.H6@53.833,32.766 ; U1.G12@53.183,37.567 U1.H12@53.821,37.567 ; U1.H12@53.752,37.566 53.832,37.566 53.833,36.767 54.478,36.121 ; U1.H3@53.833,30.366 53.833,30.359 53.935,30.257 53.935,30.207 54.067,30.074 ; v1(53.833,34.366) 53.833,35.166 54.483,35.166 54.483,35.966 55.128,36.612 U1.K11@55.128,36.766 ; U1.J5@54.483,31.966 U1.H5@53.833,31.966 ; 54.488,35.012 v1(55.133,34.366) ; R4.2@55.069,40.643 55.078,40.634 55.078,39.276 55.272,39.082 55.272,37.969 55.134,37.83 55.134,37.583 U1.K12@55.141,37.576 ; U1.K11@55.133,36.767 55.129,36.771 U1.K12@55.129,37.576 55.172,37.619 v1(55.207,37.619) ; U1.K5@55.189,32.042 55.133,31.986 U1.K5@55.133,31.966 ; U1.K12@55.267,37.576 55.272,37.581 55.772,37.581 55.786,37.567 56.153,37.2 56.714,37.2 57.081,37.567 57.084,37.567 57.087,37.567 57.454,37.2 58.012,37.2 58.379,37.567 U1.R12@58.382,37.567 ; v1(55.685,27.534) 56.434,28.283 56.434,29.566 U1.L2@55.783,29.566 ; U1.L5@55.783,31.966 U1.K5@55.133,31.966 ; U1.N8@57.084,34.366 57.084,33.545 56.83,33.291 v1(56.83,33.236) 56.869,33.197 57.303,33.197 57.734,32.766 57.734,31.966 U1.P4@57.734,31.166 ; U1.U9@59.682,35.166 59.689,35.166 59.719,35.137 60.432,35.137 60.6,34.969 v1(60.655,34.969) ; U1.U11@59.682,36.767 59.687,36.771 59.813,36.771 59.83,36.754 60.612,36.754 60.953,37.095 v1(61.008,37.095) ; U1.H5@53.833,31.966 U1.H6@53.833,32.766 ; U1.H6@53.833,32.766 54.483,32.766 55.133,32.766 U1.K5@55.133,31.966
  Top w0.508: 23.067,47.893 23.067,44.222 23.365,43.924 24.814,43.924 L6.2@25.36,43.378 25.251,43.378 L6.2@24.705,42.832 ; v1(51.873,52.163) U2.U8@51.853,52.182 U2.U8@51.853,52.182 51.853,52.133 52.454,51.532 U2.V10@53.153,51.532 v1(53.803,51.532) ; v1(55.779,52.231) 55.779,52.108 56.198,51.688 56.247,51.688 U2.V15@56.403,51.532 ; v1(60.539,26.923) 62.102,26.923 63.087,27.908 C1.2@63.087,30.532
  Bottom w0.254: C26.2@55.103,52.182 C29.2@57.053,52.182 ; v1(57.045,52.228) 57.242,52.228 57.385,52.371 C29.2@57.385,52.461
  Bottom w0.508: C27.2@42.62,51.819 C27.2@42.655,51.784 ; v1(42.988,49.37) 42.988,49.495 42.972,49.511 42.687,49.511 42.145,50.054 42.122,50.054 42.033,49.965 42.033,49.988 42.655,50.61 C27.2@42.655,51.784 ; C24.2@43.811,52.447 43.788,52.447 43.125,51.784 C27.2@42.655,51.784
  other v1: 52.531,23.349 47.226,26.922 51.038,26.929 56.58,26.922 53.863,27.768 47.244,28.321 46.99,29.21 55.232,32.045 43.307,34.29 59.723,34.447 21.805,35.577 21.169,35.609 18.598,35.633 19.33,35.633 19.991,35.633 20.612,35.633 53.713,37.566 41.91,47.648 55.11,52.236
VCC_PC: C50.2 C51.2 C97.2 R37.2 R48.1 R49.2 U2.N19 U3.C6 U3.M4 U3.N4 U3.P3 U3.P5 | length 276.6
  Top w0.254: U3.C6@88.95,53.271 89.365,53.686 89.365,55.277 v1(89.401,55.313) ; U3.M4@93.45,52.271 v1(93.95,52.271)
  Top w0.305: v1(30.099,61.595) 33.833,61.595 34.255,61.173 34.255,59.319 35.093,58.481 35.093,54.812 34.887,54.605 34.887,53.271 35.093,53.064 35.093,51.007 34.592,50.506 34.451,50.506 34.395,50.45 R48.1@33.699,50.45 ; v1(39.827,77.561) 39.827,75.87 40.508,75.188 v1@40.508,74.7
  PWR w0.305: v1(60.472,54.93) 65.339,54.93 66.061,54.208 66.061,47.121 67.081,46.101 76.073,46.101 77.216,47.244 77.216,57.785 77.978,58.547 v1(91.821,58.547) ; v1(93.345,60.452) 93.98,59.817 93.98,57.531 94.615,56.896 102.743,56.896 103.378,56.261 103.378,52.959 102.662,52.243 v1(98.773,52.243) ; v1(94.45,52.771) v1@94.479,52.742
  Bottom w0.254: v1(94.45,52.771) v1(93.95,52.271) 93.989,52.232 94.063,52.232 94.45,51.845 v1(94.45,51.771) 94.774,51.771 94.912,51.633 94.912,51.138 95.377,50.673 96.898,50.673 98.443,52.218 98.748,52.218 v1(98.773,52.243)
  Bottom w0.305: v1(14.752,42.234) 9.201,42.234 8.172,43.263 8.172,63.544 10.414,65.786 23.114,65.786 24.027,66.699 24.027,75.314 26.274,77.561 v1(39.827,77.561) 90.969,77.561 93.345,75.185 v1(93.345,60.452) 93.316,60.423 93.316,60.042 v1(91.821,58.547) 89.58,58.547 89.401,58.368 v1(89.401,55.313) ; v1(30.099,61.595) 30.099,62.484 27.813,64.77 27.813,73.279 28.943,74.409 40.246,74.409 v1(40.508,74.671) v1@40.55,74.671 ; v1(59.003,54.782) 59.044,54.782 59.192,54.93 60.403,54.93 C97.2@60.473,55 ; v1(60.472,54.93) 60.548,54.93 60.549,54.931 C97.2@60.549,55.007 ; C97.2@60.473,55.007 C97.2@60.79,55.007
VDD09_HDMI: C69.2 C107.2 C108.2 C109.2 C110.2 C111.2 C112.2 C144.2 C146.2 C147.2 C150.2 L5.2 U2.D18 U2.G12 U2.G13 U2.G14 U2.G16 U2.H13 U2.H14 U2.J13 U2.J14 U4.9 | length 18.6
  Top w0.254: 22.414,47.84 22.414,47.921 23.023,48.529 23.024,48.529 23.333,48.838 U4.9@23.333,49.551
  Top w0.305: U2.G12@54.453,58.682 U2.G13@55.103,58.682 U2.G14@55.753,58.682 U2.H14@55.753,58.032 ; U2.H13@55.131,58.032 U2.H14@55.753,58.032 ; U2.J14@55.753,57.382 U2.H14@55.753,58.032 ; v1(55.772,58.046) 55.767,58.046 U2.H14@55.753,58.032
  Top w0.508: L5.2@20.396,43.125 21.179,43.907 22.076,43.907 22.374,44.205 22.374,47.799 22.414,47.84
  Bottom w0.305: C146.2@54.014,56.451 54.027,56.438 54.978,56.438 C147.2@54.991,56.425 55.024,56.458 55.024,57.285 v1(55.122,57.383) ; v1(55.131,58.027) 55.102,57.998 55.102,57.404 v1(55.122,57.383) ; C112.2@55.847,57.219 55.799,57.267 55.238,57.267 v1(55.122,57.383) ; 56.029,58.272 56.154,58.272 56.472,58.589 56.472,58.646 56.508,58.682 v1(57.053,58.682) 57.747,59.376 57.747,59.911 v1(58.424,60.588)
  other v1: 20.447,39.37 21.082,39.37 21.844,39.37 20.447,40.005 21.082,40.005 21.844,40.005 32.493,45.568 31.228,45.723
VDD18_LPDDR: C19.2 C20.2 R39.2 U1.A3 U1.A4 U1.A5 U1.A6 U1.A10 U1.U3 U1.U4 U1.U5 U1.U6 U1.U10 | length 99.2
  Top w0.254: R39.2@33.689,58.676 33.702,58.676 34.544,57.834 v1(34.544,57.785) ; C19.2@47.199,31.443 47.961,31.443 U1.A6@49.284,32.766 ; v1(47.473,36.184) 47.512,36.145 48.056,36.145 48.204,35.998 49.251,35.998 49.272,35.976 U1.A10@49.279,35.976 ; v1(49.21,30.304) 49.272,30.366 49.284,30.366 49.284,31.166 49.284,31.966 49.288,31.971 49.288,32.27 49.403,32.385 49.403,32.64 49.284,32.759 U1.A6@49.284,32.766 ; v1(49.384,32.874) 49.384,32.87 49.284,32.77 U1.A6@49.284,32.766 ; U1.U3@59.682,30.366 59.682,31.166 59.682,31.966 v1@59.682,32.63 ; U1.U10@59.682,35.966 59.689,35.966 59.804,36.081 61.09,36.081 v1(61.113,36.058) ; v1(59.686,32.773) 59.682,32.77 59.682,32.766 60.444,32.004 C20.2@61.83,32.004
  Top w0.305: C19.2@47.199,31.443 47.199,32.049 46.862,32.386 43.435,32.386 42.926,31.877 42.926,23.749 43.913,22.762 62.386,22.762 64.262,24.638 64.262,32.333 63.956,32.639 62.155,32.639 62.072,32.557 62.072,32.122 61.955,32.004 C20.2@61.83,32.004
  Signal w0.305: v1(41.63,37.333) 46.326,37.333 v1(47.473,36.184)
  Bottom w0.254: v1(47.473,36.184) 47.528,36.184 47.864,35.848 47.882,35.848 48.03,35.699 48.03,35.466 48.869,34.627 48.869,33.388 v1(49.384,32.874) ; v1@59.707,32.773 61.163,34.229 61.163,35.091 61.113,35.141 v1(61.113,36.058)
  Bottom w0.305: v1(34.544,57.785) 34.544,55.753 35.052,55.245 35.052,50.419 41.63,43.841 v1(41.63,37.333)
VDD_CPU: C56.2 C61.2 C113.2 C114.2 C115.2 C116.2 C117.2 C118.2 L2.2 L3.2 U2.L16 U2.L17 U2.M16 U2.M17 U2.N16 U2.N17 U2.P15 U2.P16 U2.P17 | length 1.9
  Top w0.254: U2.P15@56.403,54.132 U2.P16@57.053,54.132 ; U2.N16@57.053,54.782 U2.P16@57.053,54.132 ; v1(57.703,54.132) U2.P16@57.053,54.132
  other v1: 57.698,54.744 57.1,55.428 57.715,55.417 57.053,56.082 57.744,56.077 35.216,59.721 36.695,59.775 38.869,59.775 37.854,59.811 12.573,59.944 11.928,60.027 11.938,60.579 12.573,60.579 11.938,61.214 12.573,61.214 12.573,61.849 11.938,61.976 11.938,62.738 12.573,62.738 12.598,63.298 11.984,63.317
VDD_CPUFB: U2.R16 U2.T17 U4.39 U4.40 | length 60.4
  Top w0.203: v1@21.209,60.579 21.182,60.606 21.182,60.848 21.209,60.876 21.209,64.008 22.098,64.897 34.671,64.897 35.996,63.572 35.996,61.509 35.972,61.485 35.972,57.949 36.195,57.727 v1(36.195,57.658)
  Top w0.254: U4.40@20.933,56.367 v1(21.133,56.367) U4.39@21.333,56.367
  Top w0.305: U2.R16@57.053,53.482 57.604,52.931 U2.T17@57.703,52.832 57.772,52.832 v1(57.805,52.865)
  Bottom w0.203: v1(36.195,57.658) 36.195,52.811 37.063,51.943 40.498,51.943 41.267,52.712 42.679,52.712 43.942,53.975 51.816,53.975 53.739,52.052 54.12,52.052 54.372,51.8 55.957,51.8 55.963,51.806 56.652,51.806 56.66,51.798 57.223,51.798 57.231,51.806 57.437,51.806 57.534,51.904 57.57,51.904
  Bottom w0.254: v1(21.133,56.367) v1(21.133,60.63) v1@21.209,60.706 ; 57.57,51.904 57.805,52.138 v1(57.805,52.865)
VDD_GPU: C63.2 C119.2 C120.2 C121.2 C122.2 C123.2 C124.2 L4.2 U2.L8 U2.M8 U2.M9 U2.N8 U2.N9 U2.P8 U2.P9 | length 3.9
  Top w0.254: v1(51.853,56.082) v1(51.853,55.432) v1(51.853,54.782) U2.P8@51.853,54.132 U2.P9@52.503,54.132 v1(52.503,54.782) v1(52.503,55.432)
  other v1: 10.502,51.91 11.032,51.91 11.572,51.941 11.035,52.383 11.624,52.377 10.502,52.397 39.943,54.991
VDD_GPUFB: U2.R7 U4.47 | length 52
  Top w0.254: v1(18.768,53.839) 18.807,53.878 18.944,53.878 18.998,53.932 19.298,53.932 U4.47@19.325,53.959
  Signal w0.254: v1(18.768,53.839) 17.399,52.469 17.399,45.466 18.288,44.577 43.493,44.577 44.969,46.052 44.969,53.292 45.615,53.938 50.742,53.938 51.197,53.482 v1(51.203,53.482)
VDDI: C46.2 C47.2 U3.C1 U3.C2 | length 3.6
  Top w0.127: v1(88.95,50.771) U3.C2@88.95,51.271
  Bottom w0.254: C46.2@88.497,49.447 88.497,50.318 v1(88.95,50.771) 89.471,50.249 89.471,49.49 C47.2@89.506,49.456
VRA1: C138.2 U2.C4 | length 3.1
  Top w0.127: C138.2@48.971,64.234 48.924,64.188 48.924,61.611 U2.C4@49.253,61.282
VRA2: C137.2 U2.D4 | length 5.3
  Bottom w0.127: v1(49.258,60.586) 49.253,60.591 49.253,64.24 49.965,64.952 49.965,65.449 C137.2@50.051,65.534
VREF: C60.2 U4.29 | length 3.6
  Top w0.254: U4.29@25.333,56.367 25.333,56.545 25.654,56.866 25.654,57.023
  Top w0.508: 25.654,57.023 27.051,58.42 C60.2@27.051,59.272
WIFI_CLK_IN: C42.2 U6.10 X1.1 | length 8.2
  Top w0.127: U6.10@26.194,20.399 26.194,19.272 26.543,18.923 27.178,18.923 27.559,18.542 27.559,17.697 C42.2@27.515,17.653 27.64,17.653 28.194,17.099 28.194,14.732 27.94,14.478 27.171,14.478 X1.1@27.072,14.379
WIFI_CLK_OUT: C41.1 U6.11 X1.3 | length 6
  Top w0.127: U6.11@27.083,20.399 27.083,19.526 27.559,19.05 28.829,19.05 29.151,18.728 C41.1@29.151,17.642 29.151,16.2 X1.3@29.272,16.079
WIFI_PWR_EN: R66.1 U2.F8 | length 76.1
  Bottom w0.102: v1(36.83,12.319) 35.814,12.319 34.481,13.652 34.481,22.589 34.212,22.858 31.371,22.858 29.718,24.511 29.718,32.911 27.636,34.993 27.636,47.407 28.408,48.179 30.595,48.179 30.935,48.519 30.935,57.945 32.25,59.26 50.595,59.26 50.902,58.953 51.474,58.953 v1(51.853,59.332)
WL_REG_ON: R22.2 U2.M22 U6.12 | length 85.1
  Top w0.127: U6.12@28.477,21.793 31.84,21.793 R22.2@31.89,21.842 31.89,20.942 32.361,20.471 36.893,20.471 v1(36.899,20.478) 37.701,21.279 37.701,21.645 v1(37.753,21.698) ; U2.M22@60.953,55.432 60.982,55.461 61.176,55.461 61.513,55.798 61.99,55.798 62.018,55.826 62.538,55.826 63.109,55.255 67.32,55.255 v1(67.666,55.601)
  Bottom w0.127: v1@37.753,21.713 v1(37.753,21.698) 37.753,21.683 38.216,21.22 67.653,21.22 69.81,23.377 69.81,54.142 68.351,55.601 v1(67.666,55.601)
WL_SDIO_CLK: R35.2 U6.17 | length 41.9
  Top w0.127: U6.17@28.477,26.288 35.305,26.288 36.301,27.284 36.764,27.284 38.298,28.818 38.298,48.892 38.307,48.902 38.307,49.236 43.5,54.428 44.551,54.428 45.811,55.688 45.811,56.144 R35.2@45.828,56.161
WL_SDIO_CMD: R26.2 U2.J3 U6.16 | length 48.3
  Top w0.127: U6.16@28.477,25.399 28.603,25.273 30.353,25.273 30.861,25.781 v1(31.877,25.781) ; v1(33.708,27.511) 36.67,27.511 38.071,28.912 38.071,48.986 38.08,48.996 38.08,49.33 43.406,54.655 44.267,54.655 44.438,54.655 45.086,55.304 45.086,55.475 45.086,57.069 45.549,57.531 46.185,57.531 46.333,57.383 v1(46.422,57.383) ; U2.J3@48.603,57.382 48.632,57.411 48.859,57.411 v1(48.918,57.471)
  Bottom w0.127: v1(31.877,25.781) 31.877,26.088 31.951,26.162 33.491,26.162 33.658,26.329 33.658,27.461 v1(33.708,27.511) ; v1(46.422,57.383) 46.49,57.383 46.797,57.69 48.391,57.69 48.547,57.534 48.855,57.534 v1(48.918,57.471)
WL_SDIO_D0: R25.2 U2.J5 U6.18 | length 47.6
  Top w0.127: U6.18@28.478,27.178 30.48,27.178 30.736,26.922 R25.2@31.838,26.922 31.877,26.961 31.877,27.305 32.004,27.432 33.147,27.432 33.782,26.797 v1(34.798,26.797) ; v1(36.322,26.289) 38.525,28.492 38.525,48.798 38.534,48.808 38.534,49.142 43.594,54.201 44.652,54.201 46.262,55.81 46.262,56.12 47.22,57.078 48.729,57.078 49.038,57.078 49.094,57.023 49.544,57.023 U2.J5@49.903,57.382
  Bottom w0.127: v1(34.798,26.797) 35.306,26.289 v1(36.322,26.289)
WL_SDIO_D1: R24.2 U2.H2 U6.19 | length 45.1
  Top w0.127: U6.19@28.477,28.092 28.478,28.091 R24.2@31.838,28.091 31.877,28.129 31.877,28.448 32.385,28.956 37.504,28.956 37.844,29.296 37.844,49.08 37.853,49.09 37.853,49.424 43.312,54.882 44.344,54.882 44.859,55.398 44.859,57.178 45.491,57.81 46.917,57.81 47.095,57.632 47.595,57.632 47.953,57.99 U2.H2@47.953,58.032
WL_SDIO_D2: R28.2 U2.L5 U6.14 | length 49.7
  Top w0.127: U6.14@28.477,23.596 28.503,23.622 29.718,23.622 29.847,23.493 R28.2@31.838,23.493 31.838,23.929 31.913,24.003 38.333,24.003 38.979,24.648 38.979,48.61 38.988,48.62 38.988,48.954 43.782,53.747 45.133,53.747 46.366,54.979 47.447,54.979 47.553,55.085 49.336,55.085 49.6,55.349 49.6,55.558 49.874,55.832 49.874,56.053 U2.L5@49.903,56.082
WL_SDIO_D3: R27.2 U2.H5 U6.15 | length 50.5
  Top w0.127: U6.15@28.477,24.485 28.578,24.384 29.845,24.384 30.097,24.636 R27.2@31.838,24.636 31.877,24.675 31.877,25.019 32.004,25.146 38.106,25.146 38.752,25.791 38.752,48.704 38.761,48.714 38.761,49.048 43.688,53.974 45.039,53.974 46.829,55.763 47.982,55.763 47.984,55.761 49.367,55.761 49.6,55.993 49.6,56.208 49.6,56.649 50.207,57.256 50.207,57.728 U2.H5@49.903,58.032
WL_WAKE_AP: U2.L20 U6.13 | length 86.8
  Top w0.102: U6.13@28.477,22.682 28.55,22.609 32.907,22.609 34.144,21.372 36.018,21.372 v1(36.05,21.34)
  Bottom w0.102: v1(36.05,21.34) 36.05,21.244 36.282,21.012 36.902,21.012 37.109,20.805 67.836,20.805 70.251,23.219 70.251,54.34 68.035,56.555 65.966,56.555 65.932,56.589 64.844,56.589 64.698,56.443 61.238,56.443 60.498,55.703 60.032,55.703 59.708,56.027 v1(59.708,56.119)
X32KI: C139.1 R81.2 U2.F23 X3.4 | length 4.2
  Top w0.127: U2.F23@61.603,59.332 62.18,59.909 62.981,59.909 R81.2@62.995,59.895 63.996,59.895 C139.1@64.135,60.034 65.182,60.034 X3.4@65.399,59.817
X32KO: C140.1 R81.1 U2.F22 X3.1 | length 4.8
  Top w0.127: U2.F22@60.953,59.332 61.257,59.028 62.043,59.028 62.044,59.029 R81.1@62.995,59.029 63.951,59.029 C140.1@64.158,58.823 ; C140.1@64.124,58.782 65.214,58.782 X3.1@65.399,58.967
pads on no net: CN1.14 LCD1.1 LCD1.2 LCD1.9 U1.A1 U1.A2 U1.A12 U1.A13 U1.B1 U1.B4 U1.B13 U1.C4 U1.K9 U1.R3 U1.T1 U1.T13 U1.U1 U1.U2 U1.U12 U1.U13 U2.A3 U2.A5 U2.A6 U2.A8 U2.A9 U2.A10 U2.AA3 U2.AA10 U2.B1 U2.B2 U2.B5 U2.B6 U2.B7 U2.B8 U2.B9 U2.B10 U2.C1 U2.C2 U2.C5 U2.C23 U2.D15 U2.D16 U2.E17 U2.E21 U2.E22 U2.F5 U2.F11 U2.G10 U2.H17 U2.H19 U2.J19 U2.L2 U2.L6 U2.M2 U2.M3 U2.M4 U2.M5 U2.M6 U2.N2 U2.N3 U2.P1 U2.P2 U2.P3 U2.P5 U2.P6 U2.P21 U2.P22 U2.R21 U2.T1 U2.T2 U2.T20 U2.U4 U2.V2 U2.V3 U2.V21 U2.V22 U2.V23 U2.W4 U2.W11 U2.Y21 U3.A1 U3.A2 U3.A7 U3.A8 U3.A9 U3.A10 U3.A11 U3.A12 U3.A13 U3.A14 U3.B1 U3.B7 U3.B8 U3.B9 U3.B10 U3.B11 U3.B12 U3.B13 U3.B14 U3.C7 U3.C8 U3.C9 U3.C10 U3.C11 U3.C12 U3.C13 U3.C14 U3.D1 U3.D2 U3.D3 U3.D4 U3.D12 U3.D13 U3.D14 U3.E1 U3.E2 U3.E3 U3.E5 U3.E8 U3.E9 U3.E10 U3.E12 U3.E13 U3.E14 U3.F1 U3.F2 U3.F3 U3.F10 U3.F12 U3.F13 U3.F14 U3.G1 U3.G2 U3.G3 U3.G10 U3.G12 U3.G13 U3.G14 U3.H1 U3.H2 U3.H3 U3.H12 U3.H13 U3.H14 U3.J1 U3.J2 U3.J3 U3.J12 U3.J13 U3.J14 U3.K1 U3.K2 U3.K3 U3.K6 U3.K7 U3.K10 U3.K12 U3.K13 U3.K14 U3.L1 U3.L2 U3.L3 U3.L12 U3.L13 U3.L14 U3.M1 U3.M2 U3.M3 U3.M7 U3.M8 U3.M9 U3.M10 U3.M11 U3.M12 U3.M13 U3.M14 U3.N1 U3.N3 U3.N6 U3.N7 U3.N8 U3.N9 U3.N10 U3.N11 U3.N12 U3.N13 U3.N14 U3.P1 U3.P2 U3.P7 U3.P8 U3.P9 U3.P10 U3.P11 U3.P12 U3.P13 U3.P14 U4.5 U4.14 U4.21 U4.22 U4.55 U4.56 U6.4 U6.5 U6.8 U6.29 U6.30 U6.32 U6.35 U6.37 U6.38 U6.39 U6.40 U6.45 U6.46 U6.47 U31.4 USB1.5 USB1.6 USB1.8 USB1.9 USBC1. USBC1.A2 USBC1.A3 USBC1.A6 USBC1.A7 USBC1.A8 USBC1.A10 USBC1.A11 USBC1.B2 USBC1.B3 USBC1.B6 USBC1.B7 USBC1.B8 USBC1.B10 USBC1.B11

## Polygon pours and split planes (outlines as drawn)
GND on Top "GND_L01_P035" (solid, pour order 35): 6.985,0.127 107.025,0.127 107.031,0.133 106.993,0.171 106.993,100.111 6.976,100.111 6.968,100.103
PS on Top "PS_L01_P002" (solid, pour order 2): 15.748,76.456 15.748,73.535 12.954,73.535 12.954,72.773 16.002,72.773 16.002,70.803 12.954,70.803 12.954,70.36 15.24,70.36 15.24,67.693 18.415,67.693 18.415,72.9 19.177,72.9 19.177,76.456
VDD_CPU on Top "VDD_CPU_L01_P007" (solid, pour order 7): 17.399,59.69 17.145,59.436 14.097,59.436 13.716,59.055 13.716,54.483 8.89,54.483 8.636,54.737 8.636,63.246 9.652,64.262 16.637,64.262 17.399,63.5
VCC_DRAM on Top "VCC_DRAM_L01_P024" (solid, pour order 24): 23.749,44.577 23.245,44.073 23.216,44.073 23.216,38.71 22.733,38.227 18.034,38.227 17.526,37.719 17.526,35.941 18.161,35.306 22.225,35.306 25.146,38.227 25.146,42.164 25.527,42.545 27.432,42.545 27.813,42.926 27.813,44.069 27.305,44.577
VDD09_HDMI on Top "VDD09_HDMI_L01_P014" (solid, pour order 14): 18.161,42.672 18.542,42.291 19.558,42.291 19.939,41.91 19.939,39.37 20.32,38.989 21.971,38.989 22.352,39.37 22.352,43.815 21.59,44.577 18.796,44.577 18.161,43.942
VDD_GPU on Top "VDD_GPU_L01_P011" (solid, pour order 11): 8.636,53.848 8.89,54.102 13.462,54.102 13.716,53.848 13.716,50.038 13.589,49.911 9.017,49.911 8.636,50.165
NetL3_1 on Top "NETL3_1_L01_P004" (solid, pour order 4): 18.288,63.754 18.288,59.182 19.304,58.166 21.844,58.166 22.352,57.658 22.352,55.88 23.114,55.88 23.114,57.658 21.59,59.182 21.082,59.182 20.574,59.69 20.574,63.754
NetL4_1 on Top "NETL4_1_L01_P006" (solid, pour order 6): 14.605,54.102 14.605,50.038 17.145,50.038 17.526,50.419 17.526,51.943 17.78,52.197 19.812,52.197 19.812,52.832 17.653,52.832 17.653,53.975 17.526,54.102
NetL2_1 on Top "NETL2_1_L01_P005" (solid, pour order 5): 14.605,58.674 14.605,54.737 17.272,54.737 17.526,54.991 19.685,54.991 19.685,55.88 17.526,55.88 17.526,58.166 17.018,58.674
SDC0_CMD on Top "SDC0_CMD_L01_P000" (solid, pour order 0): 19.388,80.624 19.395,80.631 19.939,80.631 19.939,80.151 19.932,80.144 19.24,80.144 19.24,80.61 19.261,80.631
GND on PWR "GND_L04_P032" (solid, pour order 32): 6.933,0.137 106.973,0.137 106.979,0.143 106.941,0.181 106.941,100.121 6.924,100.121 6.916,100.113
VCC_DRAM on PWR "VCC_DRAM_L04_P025" (solid, pour order 25): 18.173,36.08 17.78,35.687 17.78,34.036 18.415,33.401 28.956,33.401 30.48,34.925 30.48,36.449 32.131,38.1 43.307,38.1 44.069,38.862 44.069,47.117 44.704,47.752 47.625,47.752 48.641,46.736 48.641,25.4 51.308,22.733 63.5,22.733 65.151,24.384 65.151,51.181 63.119,53.213 42.164,53.213 41.402,52.451 41.402,41.402 40.386,40.386 27.94,40.386 26.924,39.37 26.924,36.83 26.047,35.953
VCC_DRAM on PWR "VCC_DRAM_L04_P026" (solid, pour order 26): 45.593,47.752 45.085,47.244 45.085,38.1 44.069,37.084 42.545,37.084 41.783,36.322 41.783,24.384 43.434,22.733 51.308,22.733 49.022,25.019 49.022,46.355 47.625,47.752